# Altium PCB DSOXLAN.PcbDoc
Units mm, origin at the board's own origin, x right, y up, seen from the top; angles counter-clockwise.
Board outline 80.63 x 58.55 mm, 4 copper layers (Top Layer, Signal Layer 1, Signal Layer 2, Bottom Layer), stack 1.563 mm thick; 19 components, 14 nets, 110 pads, 37 vias.
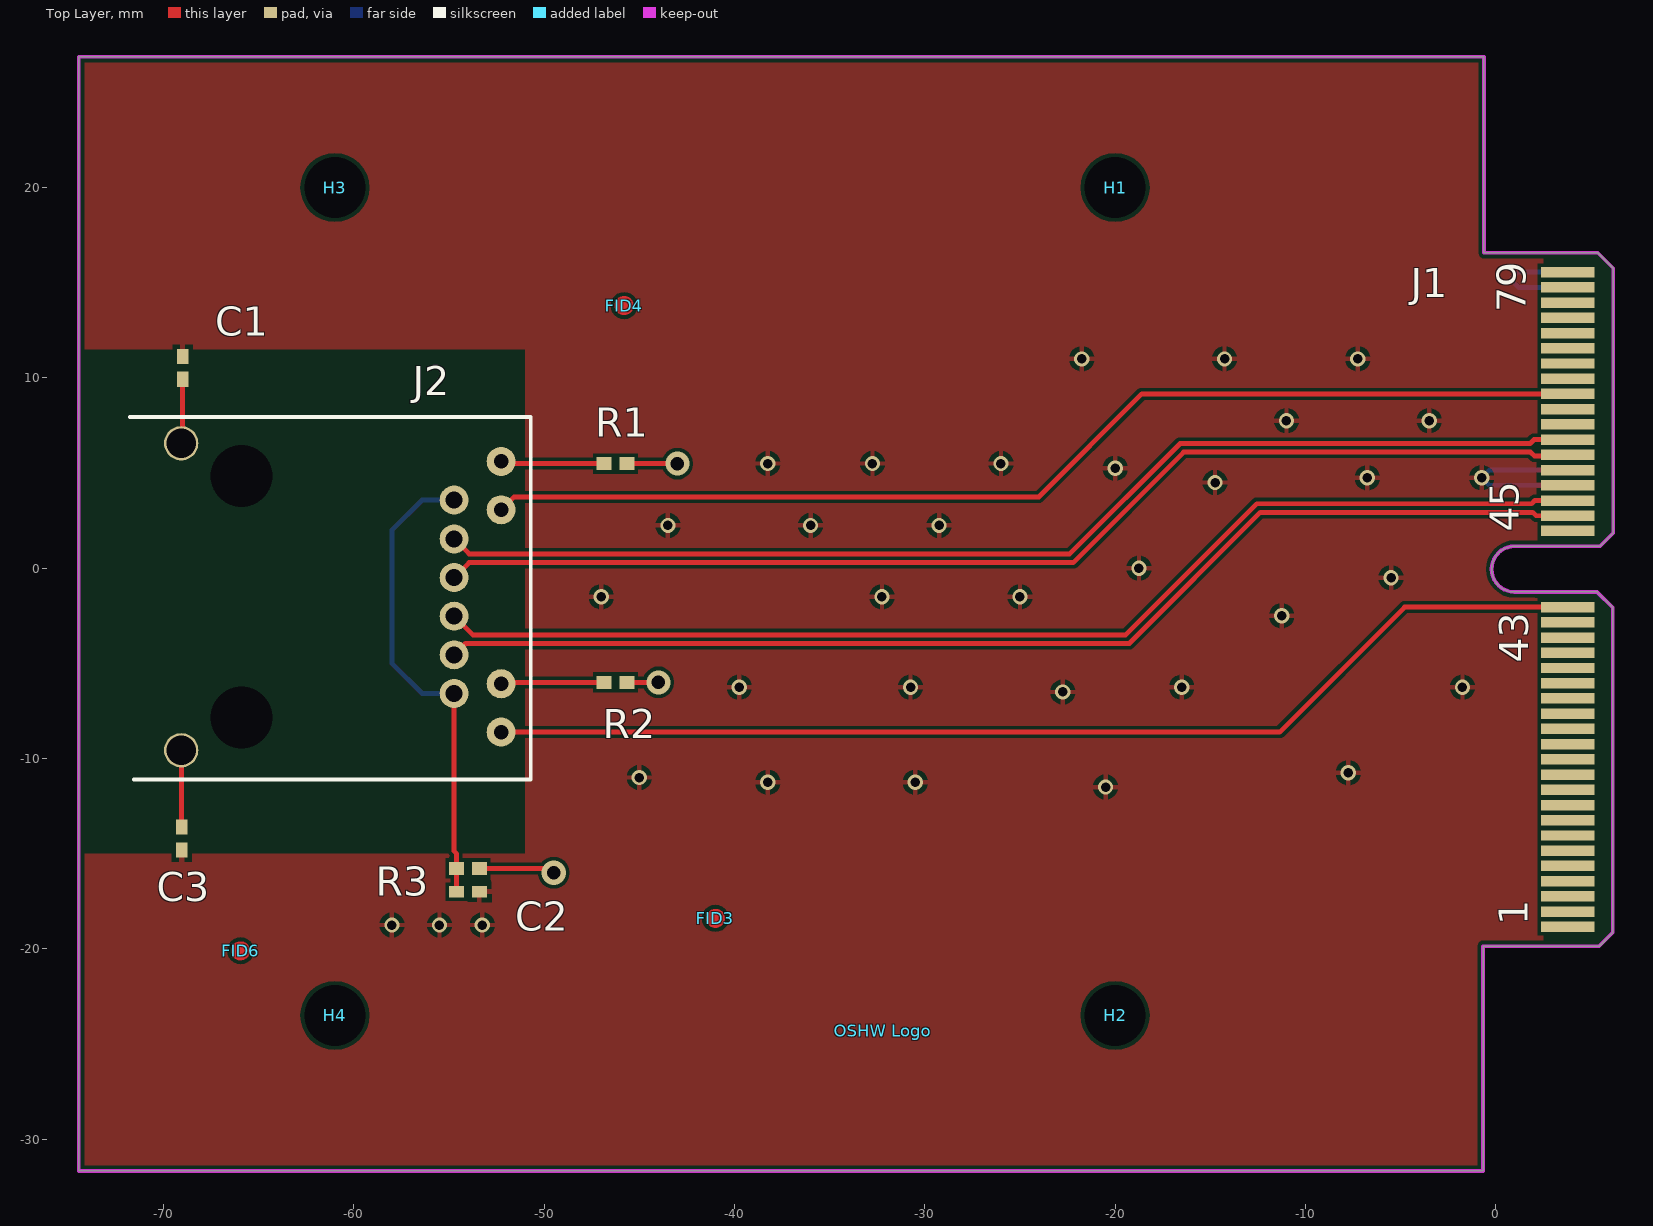
[diagram p0: Top Layer view]
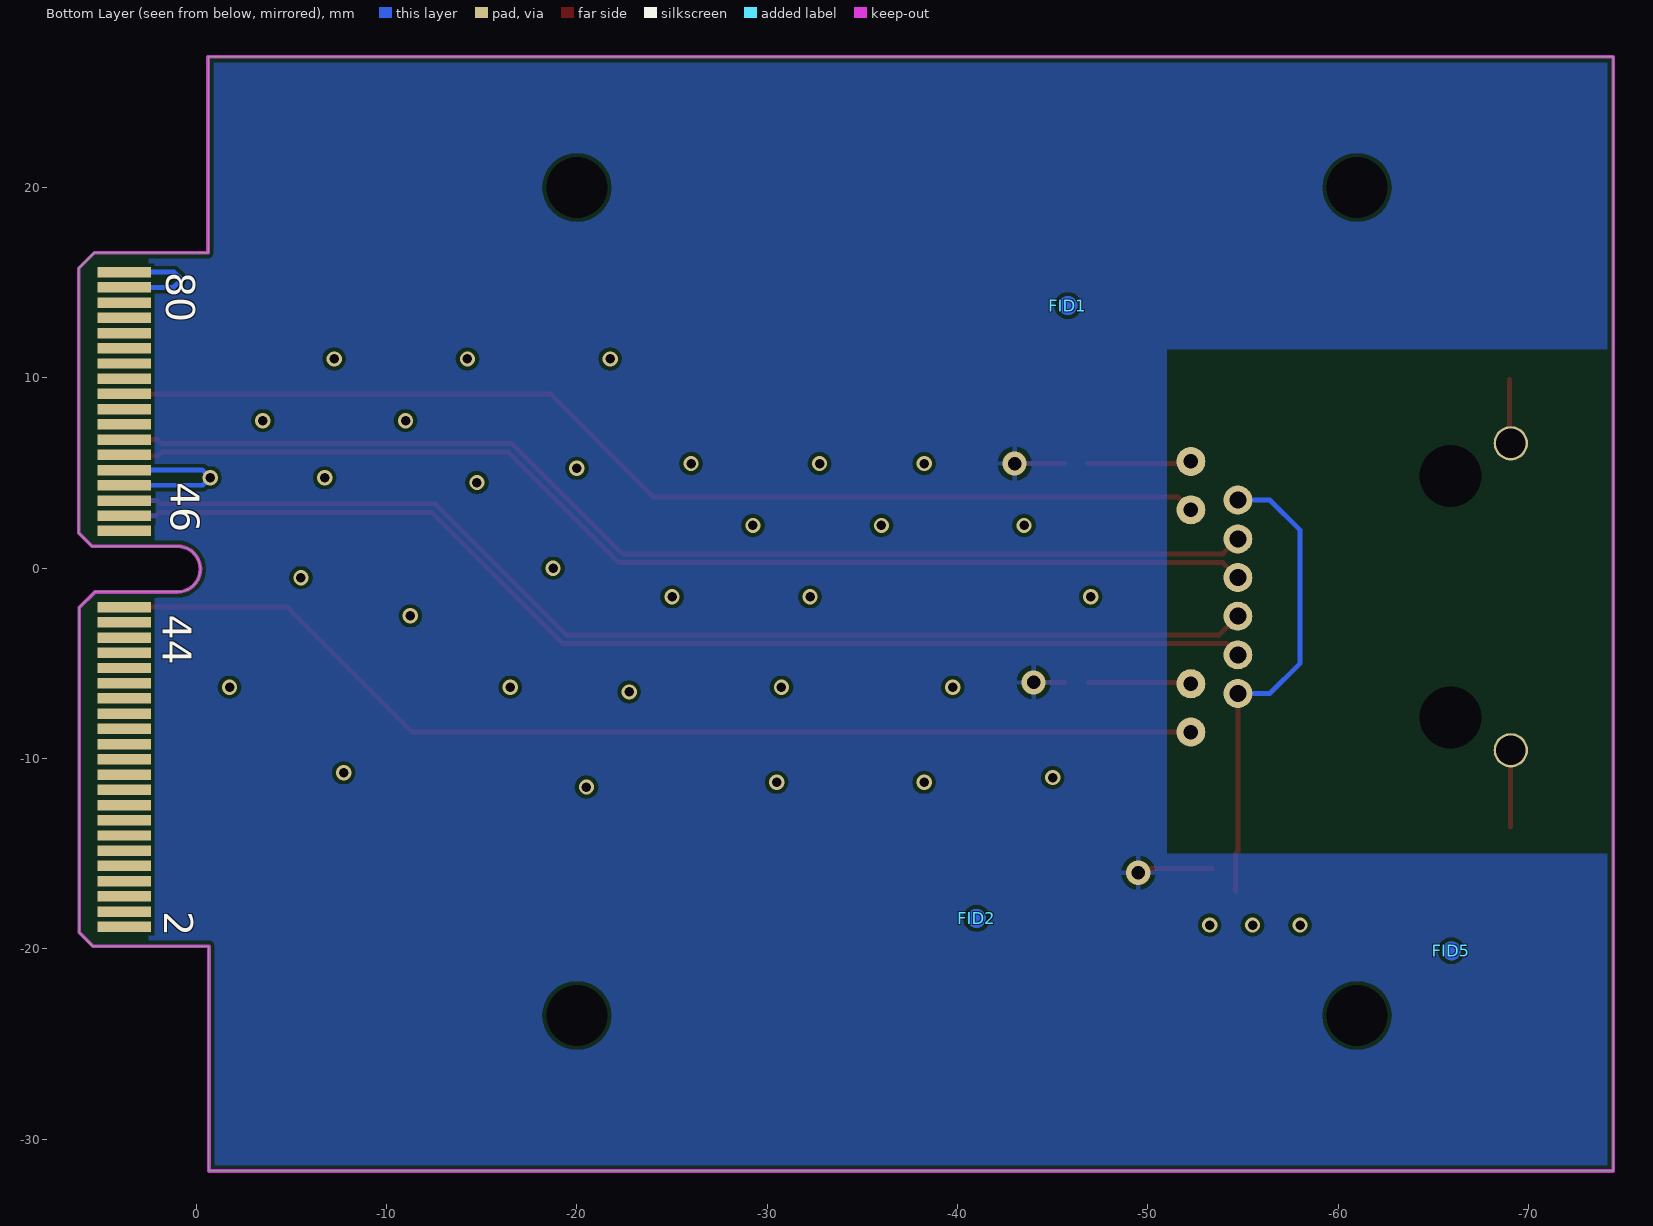
[diagram p1: Bottom Layer view, seen from below]
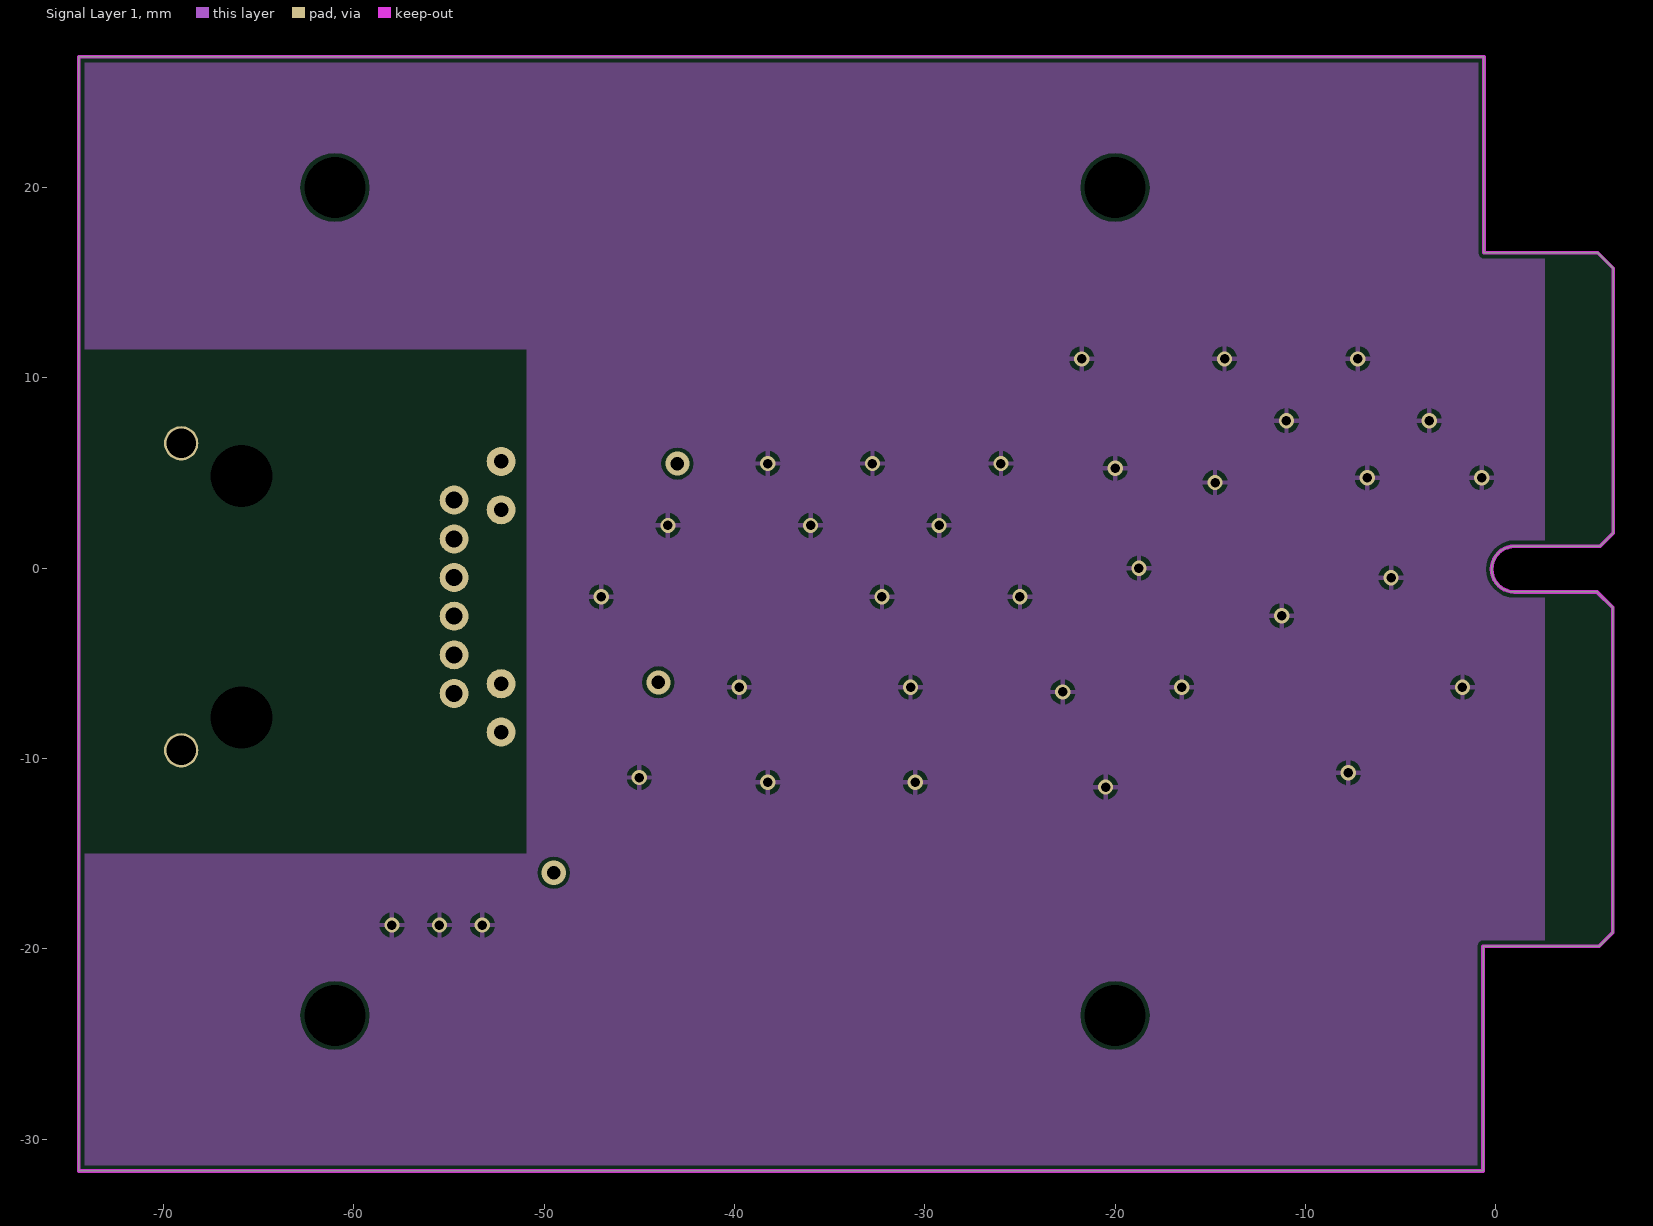
[diagram p2: Signal Layer 1]
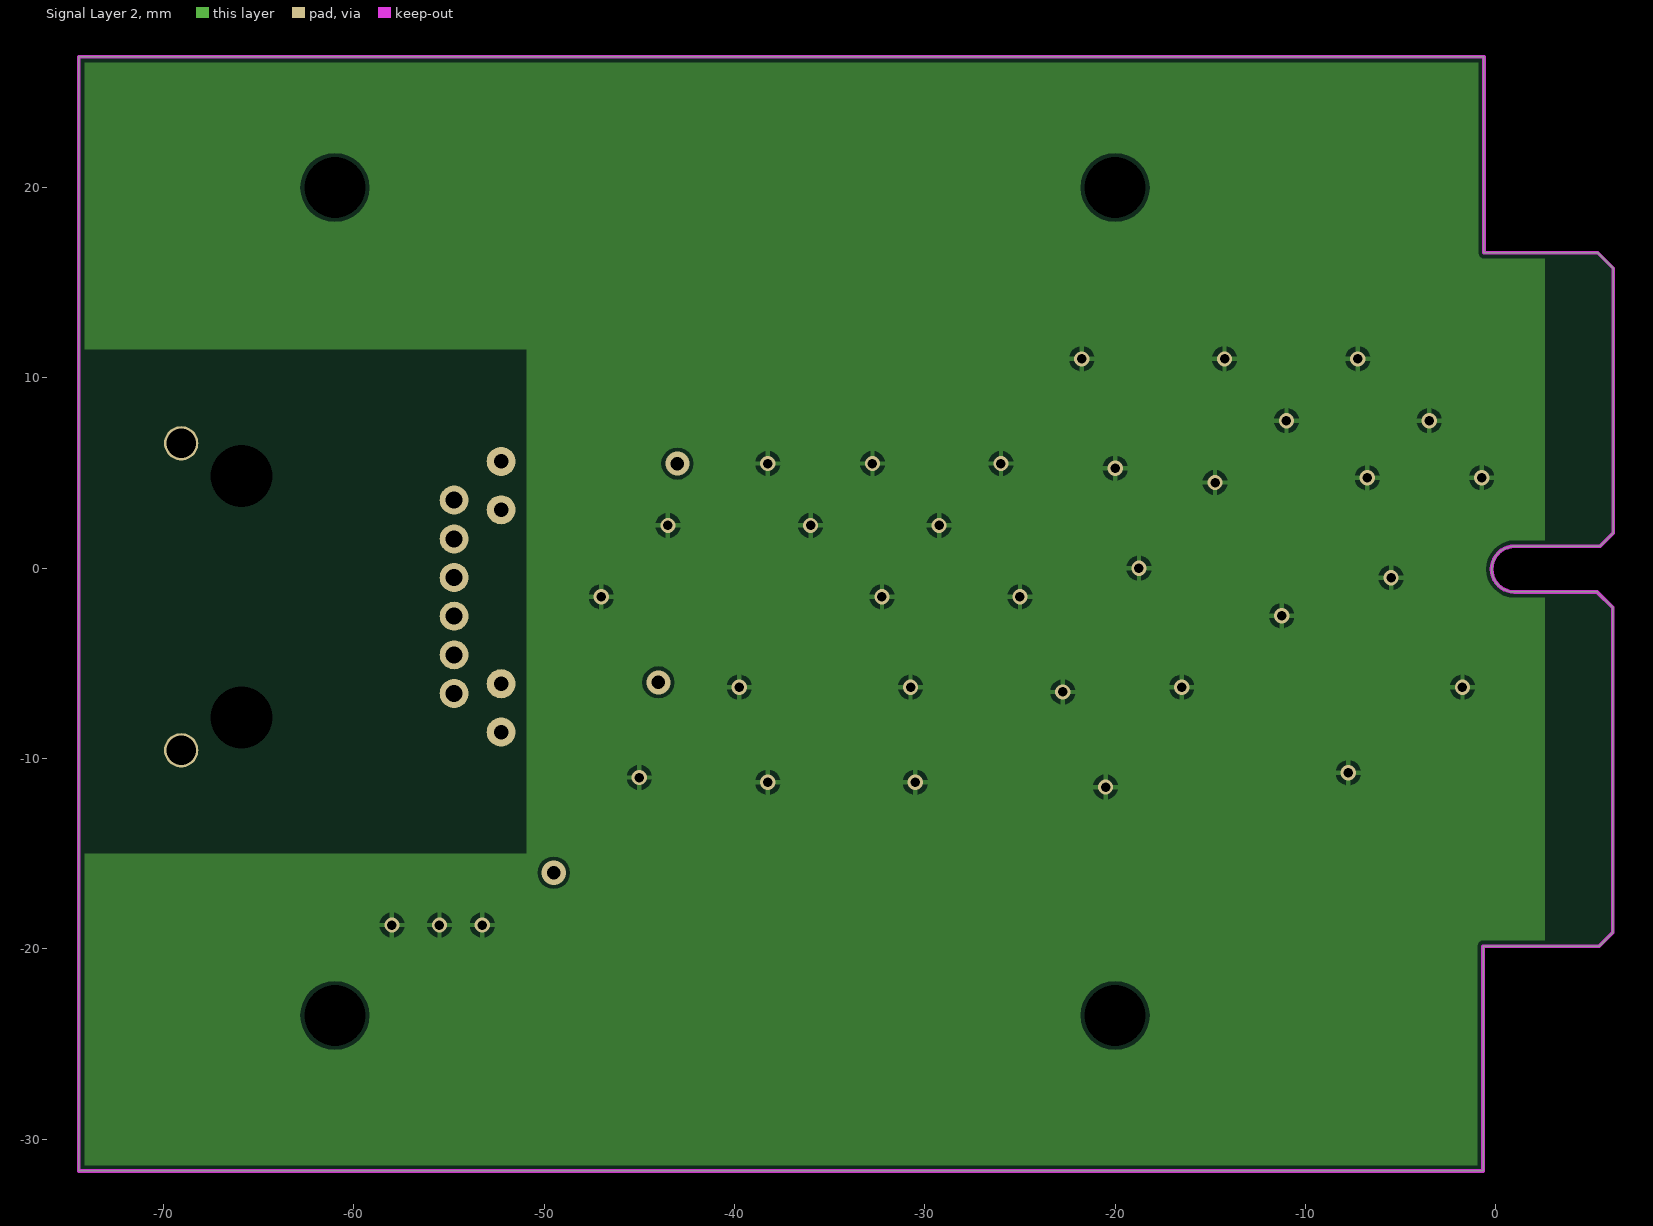
[diagram p3: Signal Layer 2]

## Layer stack, top to bottom
Top Solder: solder mask 0.0102, Solder Resist, Dk 3.5
Top Layer: signal copper 0.0356
Dielectric 1: prepreg 0.36, PR7628, Dk 4.2
Signal Layer 1: signal copper 0.036
Dielectric 3: core 0.7, FR4, Dk 4.2
Signal Layer 2: signal copper 0.036
Dielectric 2: prepreg 0.36, PR7628, Dk 4.2
Bottom Layer: signal copper 0.0356
Bottom Solder: solder mask 0.0102, Solder Resist, Dk 3.5

## Board outline
-0.67,-31.67 -0.67,-19.859 5.431,-19.859 6.147,-19.143 6.147,-2.071 5.323,-1.247 0.981,-1.247 cw(c0.981,-0.047) 0.981,1.153 0.981,1.157 5.475,1.157 6.175,1.857 6.175,15.757 5.355,16.577 -0.625,16.577 -0.625,26.877 -74.457,26.877 -74.457,-31.67

## Design rules (kind name [scope] priority, off if disabled: settings)
BoardOutlineClearance "BoardOutlineClearance Edge connector" [IsComponent] p1: gap=0
BoardOutlineClearance [All] p2: gap=0.254 except(0: Arc-SplitContinuation Track-SplitContinuation SMDPad-SplitContinuation THPad-SplitContinuation Via-SplitContinuation Fill-SplitContinuation Poly-SplitContinuation Region-SplitContinuation Text-SplitContinuation)
Clearance [All] p1: gap=0.2
DiffPairsRouting [All] p1: maxlimit=0.254 minlimit=0.2 mostfreqgap=0.2 toplayer_minwidth=0.254 toplayer_maxwidth=0.381 toplayer_prefwidth=0.254 midlayer1_minwidth=0.254 midlayer1_maxwidth=0.381 midlayer1_prefwidth=0.254 midlayer2_minwidth=0.254 midlayer2_maxwidth=0.381 midlayer2_prefwidth=0.254 bottomlayer_minwidth=0.254 bottomlayer_maxwidth=0.381 bottomlayer_prefwidth=0.254 maxuncoupledlength=12.7
HoleSize [All] p1: absolutevalues=TRUE maxlimit=3.8 minlimit=0.025 maxpercent=80.000 minpercent=20.000
MinimumSolderMaskSliver "MinimumSolderMaskSliver J1" [HasFootprint('Edge Connector 0.8mm 80P')] p1: minsoldermaskwidth=0
MinimumSolderMaskSliver [All] p2: minsoldermaskwidth=0.1
PolygonConnect [All] p1: connectstyle=Relief reliefconductorwidth=0.254 reliefentries=4 polygonreliefangle="90 Angle" airgapwidth=0.254
RoomDefinition "DSOXLAN Schematic" [InComponentClass('DSOXLAN Schematic')] p1: confinementstyle=ConfineIn formatcopy=TRUE lockcomponents=FALSE outline -86.903,-31.67 7.839,-31.67 7.839,31.195 -86.903,31.195
RoutingVias [All] p1: holewidth=0.711 width=1.27 viastyle="Through Hole" minholewidth=0.2 minwidth=0.5 maxholewidth=1 maxwidth=1.5
SolderMaskExpansion [All] p1: expansion=0.102
Width [All] p1: maxlimit=0.8 minlimit=0.2 preferedwidth=0.254
27 further rules are at their usual default settings.

## Classes and differential pairs
differential pair RX: +RX_P -RX_N
differential pair TX: +TX_P -TX_N

## Components (designator, comment, footprint, x,y, rotation, side; value= is the part's Value field where it differs from the comment)
C1 "Chip capacitor" CAPC1005N -69,10.525 r270 top
C2 "Chip capacitor" CAPC1005N -54,-17 r180 top
C3 "Chip capacitor" CAPC1005N -69.05,-14.2 r90 top
FID1 "Fiducial" "Fiducial 1mm" -45.8,13.8 r90 bottom
FID2 "Fiducial" "Fiducial 1mm" -41,-18.4 r90 bottom
FID3 "Fiducial" "Fiducial 1mm" -41,-18.4 r90 top
FID4 "Fiducial" "Fiducial 1mm" -45.8,13.8 r90 top
FID5 "Fiducial" "Fiducial 1mm" -65.95,-20.1 r90 bottom
FID6 "Fiducial" "Fiducial 1mm" -65.95,-20.1 r90 top
H1 "Hole" "Hole 3.2 non plated" -20,20 r0 top
H2 "Hole" "Hole 3.2 non plated" -20,-23.5 r0 top
H3 "Hole" "Hole 3.2 non plated" -61,20 r0 top
H4 "Hole" "Hole 3.2 non plated" -61,-23.5 r0 top
J1 "Edge connector" "Edge Connector 0.8mm 80P" 2.375,-0.043 r90 top locked
J2 "08B01X1T06-F" "RJ45 BEL 08B0-1X1T-06-F" -65.9,-1.5 r90 top locked
"OSHW Logo" "OSHW Logo" "OSHW Logo" -32.2,-24.3 r0 top
R1 "300" RESC1005N -46.25,5.5 r0 top
R2 "300" RESC1005N -46.25,-6 r0 top
R3 "10" RESC1005N -54,-15.775 r0 top

## Footprints (in the part's own frame and the unit in brackets; to place one, negate y for a bottom-side part, rotate by r counter-clockwise, add the part's x,y. Pads: shape width x height; smd on the part's side, far side on the other; paste and mask are expansions set on the pad)
CAPC1005N [mm] "Chip Capacitor, Body 1.0x0.5mm, IPC Medium Density"
  rect 0.8x0.6 smd: 1(-0.6,0) 2(0.6,0)
  body extent -0.55,-0.3 0.55,0.3, height 0.6
"Edge Connector 0.8mm 80P" [mm]
  rect 0.55x2.8 smd: 1(-18.8,-1.4) 3(-18,-1.4) 5(-17.2,-1.4) 7(-16.4,-1.4) 9(-15.6,-1.4) 11(-14.8,-1.4) 13(-14,-1.4) 15(-13.2,-1.4) 17(-12.4,-1.4) 19(-11.6,-1.4) 21(-10.8,-1.4) 23(-10,-1.4) 25(-9.2,-1.4) 27(-8.4,-1.4) 29(-7.6,-1.4) 31(-6.8,-1.4) 33(-6,-1.4) 35(-5.2,-1.4) 37(-4.4,-1.4) 39(-3.6,-1.4) 41(-2.8,-1.4) 43(-2,-1.4) 45(2,-1.4) 47(2.8,-1.4) 49(3.6,-1.4) 51(4.4,-1.4) 53(5.2,-1.4) 55(6,-1.4) 57(6.8,-1.4) 59(7.6,-1.4) 61(8.4,-1.4) 63(9.2,-1.4) 65(10,-1.4) 67(10.8,-1.4) 69(11.6,-1.4) 71(12.4,-1.4) 73(13.2,-1.4) 75(14,-1.4) 77(14.8,-1.4) 79(15.6,-1.4)
  rect 0.55x2.8 smd far side: 2(-18.8,-1.4) 4(-18,-1.4) 6(-17.2,-1.4) 8(-16.4,-1.4) 10(-15.6,-1.4) 12(-14.8,-1.4) 14(-14,-1.4) 16(-13.2,-1.4) 18(-12.4,-1.4) 20(-11.6,-1.4) 22(-10.8,-1.4) 24(-10,-1.4) 26(-9.2,-1.4) 28(-8.4,-1.4) 30(-7.6,-1.4) 32(-6.8,-1.4) 34(-6,-1.4) 36(-5.2,-1.4) 38(-4.4,-1.4) 40(-3.6,-1.4) 42(-2.8,-1.4) 44(-2,-1.4) 46(2,-1.4) 48(2.8,-1.4) 50(3.6,-1.4) 52(4.4,-1.4) 54(5.2,-1.4) 56(6,-1.4) 58(6.8,-1.4) 60(7.6,-1.4) 62(8.4,-1.4) 64(9.2,-1.4) 66(10,-1.4) 68(10.8,-1.4) 70(11.6,-1.4) 72(12.4,-1.4) 74(13.2,-1.4) 76(14,-1.4) 78(14.8,-1.4) 80(15.6,-1.4)
"Fiducial 1mm" [mm]
  Top Layer circle w0.5: c0,0 r0.25
"Hole 3.2 non plated" [mm] "Non Plated hole 3.2mm ID."
  round 0 hole 3.2 unplated mask+0: 0(0,0)
"OSHW Logo" [mm]
RESC1005N [mm] "Chip Resistor, Body 1.1x0.5mm, IPC Medium Density"
  rect 0.8x0.7 smd: 1(-0.6,0) 2(0.6,0)
  body extent -0.55,-0.3 0.55,0.3, height 0.4
"RJ45 BEL 08B0-1X1T-06-F" [mm] "RJ45 Jack with magnetics"
  round 1.524 hole 3.25 unplated: 0(-6.35,0) 0(6.35,0)
  round 1.524 hole 0.89: 1(-5.08,-11.17) 2(-3.05,-11.17) 3(-1.02,-11.17) 4(1.01,-11.17) 5(3.04,-11.17) 6(5.08,-11.17)
  round 1.524 hole 0.762: 7(-7.11,-13.64) 8(-4.57,-13.64) 9(4.57,-13.64) 10(7.11,-13.64)
  round 1.8 hole 1.57: Shield_1(-8.065,3.17) Shield_2(8.065,3.17)
  silkscreen extent -9.6,-15.2 9.45,5.87, body extent -8.9,-14.58 8.8,11.58, height 13.49

## Part data
C1 C2 C3: library part CA-Y104-SKA, "Ceramic capcitor, X7R, 0402, 100nF, 10%, 50V"
FID1 FID2 FID3 FID4 FID5 FID6: library part "Fiducial mark", "Fiducial mark 1mm"
H1 H2 H3 H4: library part "Hole 3.2mm NP", "Non Plated Hole, 3.2mm ID"
J1: library part "Edge Connector 0.8mm 80 Pos", "Edge contact 80pos 0.8p"
J2: library part "RJ45 T.H. W/Mag Bel Fuse", "RJ45 TH With magnetics"
"OSHW Logo": "Solder mask logo"
R1 R2: library part RA-300R-S00, "300Ohm 0402 1% resistor"
R3: library part RA-10R0-S00, "10 Ohm 0402 Resistor"

## Via types
v1: diameter 0.8, hole 0.5, Top Layer to Bottom Layer, 34 vias
v2: diameter 1.27, hole 0.711, Top Layer to Bottom Layer, 3 vias

## Nets (pads, with @x,y where several pads share a name; then routed paths per layer and width w, separated by ;. In a path a pad name is that pad's centre, name@x,y a point inside that pad or via, vN(x,y) a via of type N, cw(c..) or ccw(c..) an arc to the next point about the centre after c; other vN are vias at no path point)
3V3: J1.48 J1.50 R1.2 R2.2 R3.2 | length 8.3
  Top Layer w0.254: R3.2 -49.725,-15.775 v2(-49.5,-16) ; R2.2 v2(-44,-6) ; R1.2 v2(-43,5.5)
CT: C2.2 J2.1 J2.6 R3.1 | length 25.3
  Top Layer w0.254: J2.1 -54.73,-14.87 -54.6,-15 R3.1 C2.2
  Bottom Layer w0.254: J2.1 -56.42,-6.58 -58,-5 -58,2 -56.42,3.58 J2.6
GND: C1.1 C2.1 C3.1 J1.51 J1.52 J1.53 J1.54 | length 9
  Bottom Layer w0.254: J1.54@3.379,5.157 -0.343,5.157 v1(-0.743,4.757) -0.35,4.364 -0.35,4.357 J1.52
  other v1: -58,-18.75 -55.5,-18.75 -53.25,-18.75 -20.5,-11.5 -38.25,-11.25 -30.5,-11.25 -45,-11 -7.75,-10.75 -22.75,-6.5 -39.75,-6.25 -30.75,-6.25 -16.5,-6.25 -1.75,-6.25 -11.25,-2.5 -47,-1.5 -32.25,-1.5 -25,-1.5 -5.5,-0.5 -18.75,0 -43.5,2.25 -36,2.25 -29.25,2.25 -14.75,4.5 -6.75,4.75 -20,5.25 -38.25,5.5 -32.75,5.5 -26,5.5 -11,7.75 -3.5,7.75 -21.75,11 -14.25,11 -7.25,11
LED1_N: J1.63 J2.9 | length 58.6
  Top Layer w0.254: J2.9 -51.58,3.75 -24,3.75 -18.593,9.157 J1.63
LED2_N: J1.43 J2.7 | length 58.8
  Top Layer w0.254: J2.7 -11.36,-8.61 -4.793,-2.043 J1.43
NetC1_2: C1.2 J2.Shield_2 | length 3.4
  Top Layer w0.254: J2.Shield_2 -69,6.635 C1.2
NetC3_2: C3.2 J2.Shield_1 | length 4
  Top Layer w0.254: J2.Shield_1 -69.05,-9.585 C3.2
NetJ1_78: J1.78 J1.80 | length 6.3
  Bottom Layer w0.254: J1.78 1.193,14.757 0.85,15.1 0.85,15.25 1.157,15.557 J1.80
NetJ2_8: J2.8 R2.1 | length 5.4
  Top Layer w0.254: J2.8 -52.19,-6 R2.1
NetJ2_10: J2.10 R1.1 | length 5.5
  Top Layer w0.254: J2.10 -52.15,5.5 R1.1
RX_N: J1.57 J2.5 | length 61.3
  Top Layer w0.254: J2.5 -53.942,0.752 -22.39,0.752 -16.588,6.554 1.804,6.554 2.007,6.757 J1.57
RX_P: J1.55 J2.4 | length 60.5
  Top Layer w0.254: J2.4 -53.942,0.298 -22.202,0.298 -16.4,6.1 1.825,6.1 2.025,5.9 J1.55@2.945,5.9
TX_N: J1.49 J2.3 | length 61.8
  Top Layer w0.254: J2.3 -53.75,-3.5 -19.442,-3.5 -12.558,3.384 1.884,3.384 2.057,3.557 J1.49
TX_P: J1.47 J2.2 | length 61.7
  Top Layer w0.254: J2.2 -54.134,-3.954 -19.254,-3.954 -12.37,2.93 1.945,2.93 2.118,2.757 J1.47
pads on no net: H1.0 H2.0 H3.0 H4.0 J1.1 J1.2 J1.3 J1.4 J1.5 J1.6 J1.7 J1.8 J1.9 J1.10 J1.11 J1.12 J1.13 J1.14 J1.15 J1.16 J1.17 J1.18 J1.19 J1.20 J1.21 J1.22 J1.23 J1.24 J1.25 J1.26 J1.27 J1.28 J1.29 J1.30 J1.31 J1.32 J1.33 J1.34 J1.35 J1.36 J1.37 J1.38 J1.39 J1.40 J1.41 J1.42 J1.44 J1.45 J1.46 J1.56 J1.58 J1.59 J1.60 J1.61 J1.62 J1.64 J1.65 J1.66 J1.67 J1.68 J1.69 J1.70 J1.71 J1.72 J1.73 J1.74 J1.75 J1.76 J1.77 J1.79 J2.0

## Polygon pours and split planes (outlines as drawn)
GND on Top Layer "GND" (solid, remove dead copper, pour order 0): 2.5,16.5 2.5,-19.873 -0.373,-19.873 -0.5,-20 -0.5,-32 -74.5,-32 -74.5,-15 -51,-15 -51,11.5 -74.5,11.5 -74.5,27 -0.5,27 -0.5,17 -0.5,16.5
3V3 on Bottom Layer "3V3" (solid, remove dead copper, pour order 2): 2.5,16.5 2.5,-19.873 -0.373,-19.873 -0.5,-20 -0.5,-32 -74.5,-32 -74.5,-15 -51,-15 -51,11.5 -74.5,11.5 -74.5,27 -0.5,27 -0.5,17 -0.5,16.5
GND on Signal Layer 1 "GND" (solid, remove dead copper, pour order 4): 2.576,16.5 2.576,-19.873 -0.297,-19.873 -0.424,-20 -0.424,-32 -74.424,-32 -74.424,-15 -50.924,-15 -50.924,11.5 -74.424,11.5 -74.424,27 -0.424,27 -0.424,17 -0.424,16.5
GND on Signal Layer 2 "GND" (solid, remove dead copper, pour order 6): 2.576,16.5 2.576,-19.873 -0.297,-19.873 -0.424,-20 -0.424,-32 -74.424,-32 -74.424,-15 -50.924,-15 -50.924,11.5 -74.424,11.5 -74.424,27 -0.424,27 -0.424,17 -0.424,16.5

## Keep-outs
Keep-Out Layer:
  lines w0.2: 0.981,1.153 ccw(c0.981,-0.047) 0.981,-1.247 5.323,-1.247 6.147,-2.071 6.147,-19.143 5.431,-19.859 -0.67,-19.859 -0.67,-31.67 -74.457,-31.67 -74.457,26.877 -0.625,26.877 -0.625,16.577 5.355,16.577 6.175,15.757 6.175,1.857 5.475,1.157 0.981,1.157

## Dimensions
5.475,1.157 to 5.323,-1.247 on Mechanical 2
-74.457,26.877 to -74.9,-31.7 on Mechanical 2
-74.457,26.877 to 6.175,15.757 on Mechanical 2
5.431,-19.859 to -0.67,-31.67 on Mechanical 2
6.175,15.757 to -0.625,16.577 on Mechanical 2
-0.625,26.877 to 5.355,16.577 on Mechanical 2
5.431,-19.859 to 5.323,-1.247 on Mechanical 2

## Text inside footprints (layer, text, board x,y; h text height)
J1: Top Overlay "1" at 1.675,-18.75 h1.52 r90; Top Overlay "79" at 1.575,13.457 h1.52 r90; Top Overlay "43" at 1.7,-4.975 h1.52 r90; Top Overlay "45" at 1.2,1.925 h1.52 r90; Bottom Overlay "44" at 1.75,-2.45 h1.52 r90; Bottom Overlay "80" at 1.575,15.557 h1.52 r90; Bottom Overlay "2" at 1.675,-18.025 h1.52 r90; Bottom Overlay "46" at 1.325,4.525 h1.52 r90